# Altium PCB EHR.PcbDoc (part 2 of 4)
Units mm, origin at the board's own origin, x right, y up, seen from the top; angles counter-clockwise.
Board outline 200 x 110 mm, 2 copper layers (Top Layer, Bottom Layer), stack 1.646 mm thick; 17 components, 171 nets, 955 pads, 288 vias.
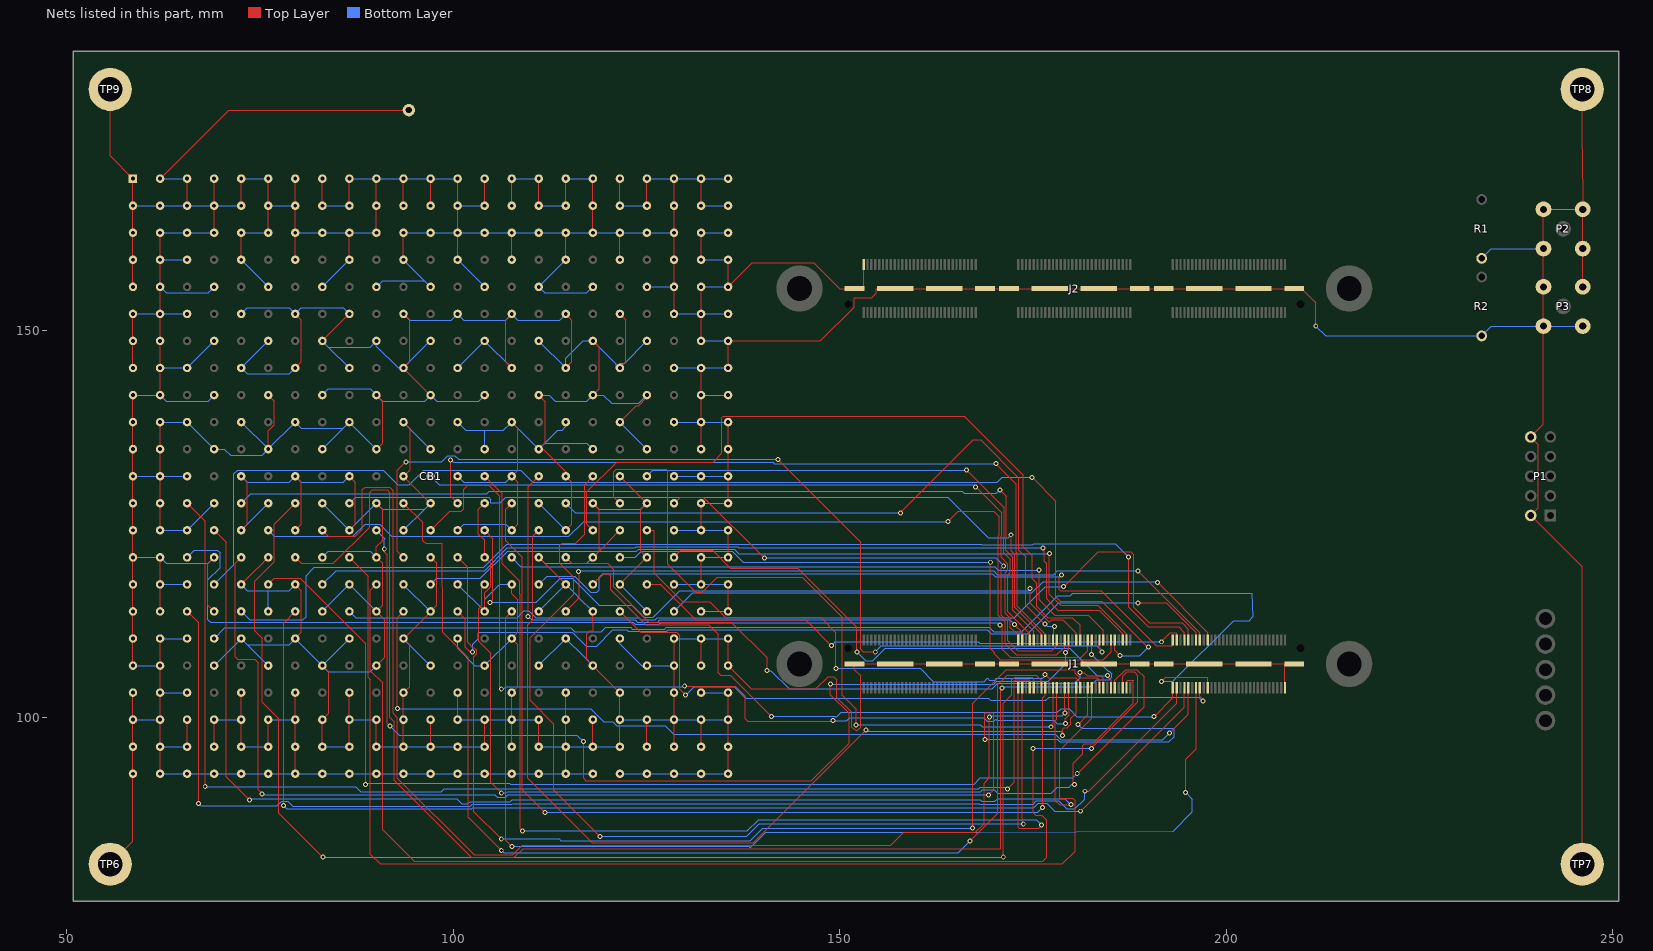
[diagram p2: the nets of this part, all layers, seen from the top]

## Via types
v1: diameter 0.64, hole 0.39, Top Layer to Bottom Layer, 288 vias

## Nets (pads, with @x,y where several pads share a name; then routed paths per layer and width w, separated by ;. In a path a pad name is that pad's centre, name@x,y a point inside that pad or via, vN(x,y) a via of type N, cw(c..) or ccw(c..) an arc to the next point about the centre after c; other vN are vias at no path point) (continued)
DGND: CB1.1 CB1.2 CB1.3 CB1.4 CB1.5 CB1.6 CB1.7 CB1.8 CB1.9 CB1.10 CB1.11 CB1.12 CB1.13 CB1.14 CB1.15 CB1.16 CB1.17 CB1.18 CB1.19 CB1.20 CB1.21 CB1.22 CB1.23 CB1.24 CB1.25 CB1.26 CB1.27 CB1.28 CB1.29 CB1.30 CB1.31 CB1.32 CB1.33 CB1.34 CB1.35 CB1.36 CB1.37 CB1.38 CB1.39 CB1.40 CB1.41 CB1.42 CB1.43 CB1.44 CB1.45 CB1.46 CB1.47 CB1.48 CB1.49 CB1.50 CB1.51 CB1.52 CB1.53 CB1.54 CB1.55 CB1.56 CB1.57 CB1.58 CB1.59 CB1.60 CB1.61 CB1.62 CB1.63 CB1.64 CB1.65 CB1.66 CB1.67 CB1.68 CB1.69 CB1.70 CB1.71 CB1.72 CB1.74 CB1.76 CB1.78 CB1.80 CB1.82 CB1.84 CB1.86 CB1.88 CB1.90 CB1.91 CB1.92 CB1.93 CB1.94 CB1.96 CB1.98 CB1.100 CB1.102 CB1.104 CB1.106 CB1.108 CB1.110 CB1.112 CB1.113 CB1.114 CB1.115 CB1.116 CB1.117 CB1.118 CB1.120 CB1.122 CB1.124 CB1.126 CB1.128 CB1.130 CB1.132 CB1.134 CB1.136 CB1.137 CB1.138 CB1.139 CB1.140 CB1.142 CB1.144 CB1.146 CB1.148 CB1.150 CB1.152 CB1.154 CB1.156 CB1.158 CB1.160 CB1.161 CB1.162 CB1.163 CB1.164 CB1.166 CB1.168 CB1.170 CB1.172 CB1.174 CB1.176 CB1.178 CB1.180 CB1.182 CB1.183 CB1.184 CB1.185 CB1.186 CB1.188 CB1.190 CB1.192 CB1.194 CB1.196 CB1.198 CB1.200 CB1.202 CB1.204 CB1.206 CB1.207 CB1.208 CB1.209 CB1.210 CB1.212 CB1.214 CB1.216 CB1.218 CB1.220 CB1.222 CB1.224 CB1.226 CB1.228 CB1.229 CB1.230 CB1.231 CB1.232 CB1.234 CB1.236 CB1.238 CB1.240 CB1.242 CB1.244 CB1.246 CB1.248 CB1.250 CB1.252 CB1.253 CB1.254 CB1.255 CB1.256 CB1.258 CB1.260 CB1.262 CB1.264 CB1.266 CB1.268 CB1.270 CB1.272 CB1.274 CB1.275 CB1.276 CB1.277 CB1.278 CB1.280 CB1.282 CB1.284 CB1.286 CB1.288 CB1.290 CB1.292 CB1.294 CB1.296 CB1.298 CB1.299 CB1.300 CB1.301 CB1.302 CB1.304 CB1.306 CB1.308 CB1.310 CB1.312 CB1.314 CB1.316 CB1.318 CB1.320 CB1.321 CB1.322 CB1.323 CB1.324 CB1.326 CB1.328 CB1.330 CB1.332 CB1.334 CB1.336 CB1.338 CB1.340 CB1.342 CB1.344 CB1.345 CB1.346 CB1.347 CB1.348 CB1.350 CB1.352 CB1.354 CB1.356 CB1.358 CB1.360 CB1.362 CB1.364 CB1.366 CB1.367 CB1.368 CB1.369 CB1.370 CB1.372 CB1.374 CB1.376 CB1.378 CB1.380 CB1.382 CB1.384 CB1.386 CB1.388 CB1.390 CB1.391 CB1.392 CB1.393 CB1.394 CB1.396 CB1.398 CB1.400 CB1.402 CB1.404 CB1.406 CB1.408 CB1.410 CB1.412 CB1.413 CB1.414 CB1.415 CB1.416 CB1.418 CB1.420 CB1.422 CB1.424 CB1.426 CB1.428 CB1.430 CB1.432 CB1.434 CB1.435 CB1.436 CB1.437 CB1.438 CB1.439 CB1.440 CB1.442 CB1.444 CB1.446 CB1.448 CB1.450 CB1.452 CB1.454 CB1.456 CB1.458 CB1.459 CB1.460 CB1.461 CB1.462 CB1.463 CB1.464 CB1.465 CB1.466 CB1.467 CB1.468 CB1.469 CB1.470 CB1.471 CB1.472 CB1.473 CB1.474 CB1.475 CB1.476 CB1.477 CB1.478 CB1.479 CB1.480 CB1.481 CB1.482 CB1.483 CB1.484 CB1.485 CB1.486 CB1.487 CB1.488 CB1.489 CB1.490 CB1.491 CB1.492 CB1.493 CB1.494 CB1.495 CB1.496 CB1.497 CB1.498 CB1.499 CB1.500 CB1.501 CB1.502 CB1.503 CB1.504 CB1.505 CB1.506 CB1.507 CB1.508 CB1.509 CB1.510 CB1.511 CB1.512 CB1.513 CB1.514 CB1.515 CB1.516 CB1.517 CB1.518 CB1.519 CB1.520 CB1.521 CB1.522 CB1.523 CB1.524 CB1.525 CB1.526 CB1.527 CB1.528 CB1.529 J1.180 J1.181 J1.182 J1.183 J1.184 J1.185 J1.186 J1.187 J1.188 J1.189 J1.190 J1.191 J1.192 J2.180 J2.181 J2.182 J2.183 J2.184 J2.185 J2.186 J2.187 J2.188 J2.189 J2.190 J2.191 J2.192 P1.2 P1.10 P2.2 P2.3 P2.4 P2.5 P3.2 P3.3 P3.4 P3.5 pad.0@94.234,178.562 R1.1 R2.1 TP6.0 TP7.0 TP8.0 TP9.0 | length 2063.3
  Top Layer w0.15: TP6.0@55.6,81 58.547,83.947 CB1.507@58.547,92.7 CB1.484@58.547,96.2 CB1.461@58.547,99.7 CB1.438@58.547,103.2 ; TP9.0@55.6,181.25 55.6,172.647 CB1.1@58.547,169.7 CB1.24@58.547,166.2 CB1.47@58.547,162.7 CB1.70@58.547,159.2 CB1.93@58.547,155.7 ; CB1.415@58.547,106.7 CB1.392@58.547,110.2 CB1.369@58.547,113.7 CB1.346@58.547,117.2 CB1.323@58.547,120.7 CB1.300@58.547,124.2 CB1.277@58.547,127.7 CB1.254@58.547,131.2 CB1.231@58.547,134.7 CB1.208@58.547,138.2 CB1.185@58.547,141.7 ; CB1.162@58.547,145.2 CB1.139@58.547,148.7 CB1.116@58.547,152.2 ; CB1.508@62.047,92.7 CB1.485@62.047,96.2 CB1.462@62.047,99.7 CB1.439@62.047,103.2 CB1.416@62.047,106.7 CB1.393@62.047,110.2 ; CB1.370@62.047,113.7 CB1.347@62.047,117.2 CB1.324@62.047,120.7 ; CB1.301@62.047,124.2 CB1.278@62.047,127.7 CB1.255@62.047,131.2 CB1.232@62.047,134.7 CB1.209@62.047,138.2 ; CB1.186@62.047,141.7 CB1.163@62.047,145.2 CB1.140@62.047,148.7 CB1.117@62.047,152.2 CB1.94@62.047,155.7 CB1.71@62.047,159.2 CB1.48@62.047,162.7 ; CB1.2@62.047,169.7 70.909,178.562 pad.0@94.234,178.562 ; CB1.486@65.547,96.2 CB1.463@65.547,99.7 ; CB1.26@65.547,166.2 CB1.3@65.547,169.7 ; CB1.487@69.047,96.2 CB1.464@69.047,99.7 ; CB1.372@69.047,113.7 68.25,114.497 68.25,119.903 CB1.326@69.047,120.7 ; CB1.50@69.047,162.7 CB1.27@69.047,166.2 CB1.4@69.047,169.7 ; CB1.488@72.547,96.2 CB1.465@72.547,99.7 CB1.442@72.547,103.2 ; CB1.350@72.547,117.2 74.719,119.372 74.723,119.372 76.047,120.696 CB1.328@76.047,120.7 ; CB1.304@72.547,124.2 73.33,124.983 73.33,130.417 CB1.258@72.547,131.2 ; CB1.74@72.547,159.2 CB1.51@72.547,162.7 ; CB1.28@72.547,166.2 CB1.5@72.547,169.7 ; CB1.489@76.047,96.2 CB1.466@76.047,99.7 ; CB1.236@76.047,134.7 76.047,137.068 76.835,137.856 76.835,140.912 CB1.190@76.047,141.7 ; CB1.52@76.047,162.7 CB1.29@76.047,166.2 CB1.6@76.047,169.7 ; CB1.513@79.547,92.7 CB1.490@79.547,96.2 CB1.467@79.547,99.7 CB1.444@79.547,103.2 ; CB1.398@79.547,110.2 80.34,110.993 80.34,116.407 CB1.352@79.547,117.2 ; CB1.306@79.547,124.2 80.34,124.993 80.34,130.407 CB1.260@79.547,131.2 ; CB1.168@79.547,145.2 80.34,145.993 80.34,151.407 CB1.122@79.547,152.2 ; CB1.76@79.547,159.2 CB1.53@79.547,162.7 CB1.30@79.547,166.2 CB1.7@79.547,169.7 ; CB1.491@83.047,96.2 CB1.468@83.047,99.7 83.845,100.498 83.845,105.902 CB1.422@83.047,106.7 ; CB1.146@83.047,148.7 85.125,150.778 CB1.124@86.547,152.2 ; CB1.31@83.047,166.2 CB1.8@83.047,169.7 ; CB1.492@86.547,96.2 CB1.469@86.547,99.7 CB1.446@86.547,103.2 ; CB1.308@86.547,124.2 87.325,124.978 87.325,130.422 CB1.262@86.547,131.2 ; CB1.78@86.547,159.2 CB1.55@86.547,162.7 ; CB1.32@86.547,166.2 CB1.9@86.547,169.7 ; CB1.493@90.047,96.2 CB1.470@90.047,99.7 ; CB1.424@90.047,106.7 91.122,107.775 91.122,112.625 CB1.378@90.047,113.7 90.83,114.483 90.83,119.917 CB1.332@90.047,120.7 90.047,122.047 90.83,122.83 90.83,126.917 CB1.286@90.047,127.7 ; CB1.240@90.047,134.7 90.83,135.483 90.83,140.917 CB1.194@90.047,141.7 ; CB1.56@90.047,162.7 CB1.33@90.047,166.2 CB1.10@90.047,169.7 ; CB1.494@93.547,96.2 CB1.471@93.547,99.7 CB1.448@93.547,103.2 94.336,103.989 94.336,109.411 CB1.402@93.554,110.193 ; CB1.402@93.547,110.2 CB1.402@93.554,110.193 ; CB1.218@93.547,138.2 94.411,137.336 94.411,132.064 CB1.264@93.547,131.2 93.547,131.186 97.033,127.7 CB1.288@97.047,127.7 ; CB1.126@93.547,152.2 94.336,151.411 94.336,145.989 CB1.172@93.547,145.2 93.547,145.181 97.028,141.7 CB1.196@97.047,141.7 ; CB1.80@93.547,159.2 CB1.57@93.547,162.7 ; CB1.34@93.547,166.2 CB1.11@93.547,169.7 ; CB1.495@97.047,96.2 CB1.472@97.047,99.7 ; CB1.334@97.047,120.7 97.841,119.906 97.841,114.494 CB1.380@97.047,113.7 97.047,113.685 CB1.402@93.554,110.193 ; CB1.35@97.047,166.2 CB1.12@97.047,169.7 ; CB1.473@100.547,99.7 CB1.450@100.547,103.2 ; CB1.82@100.547,159.2 CB1.59@100.547,162.7 CB1.36@100.547,166.2 CB1.13@100.547,169.7 ; CB1.497@104.047,96.2 CB1.474@104.047,99.7 ; CB1.382@104.047,113.7 104.047,116.104 104.822,116.879 104.822,119.925 CB1.336@104.047,120.7 104.047,122.889 103.251,123.685 103.251,126.904 CB1.290@104.047,127.7 ; CB1.37@104.047,166.2 CB1.14@104.047,169.7 ; CB1.498@107.547,96.2 CB1.475@107.547,99.7 CB1.452@107.547,103.2 108.331,103.984 108.331,109.416 CB1.406@107.547,110.2 108.331,110.984 108.331,115.211 107.547,115.995 CB1.360@107.547,117.2 ; CB1.314@107.547,124.2 108.331,124.984 108.331,130.416 CB1.268@107.547,131.2 108.331,131.984 108.331,137.416 CB1.222@107.547,138.2 ; CB1.176@107.547,145.2 106.756,145.991 106.756,151.409 CB1.130@107.547,152.2 ; CB1.84@107.547,159.2 CB1.61@107.547,162.7 ; CB1.38@107.547,166.2 CB1.15@107.547,169.7 ; CB1.499@111.047,96.2 CB1.476@111.047,99.7 ; CB1.338@111.047,120.7 111.047,120.696 114.543,117.2 CB1.362@114.547,117.2 ; CB1.200@111.047,141.7 111.894,140.853 111.894,135.547 CB1.246@111.047,134.7 111.628,134.7 114.547,131.781 CB1.270@114.547,131.2 115.341,130.406 115.341,124.994 CB1.316@114.547,124.2 ; CB1.39@111.047,166.2 CB1.16@111.047,169.7 ; CB1.523@114.547,92.7 CB1.500@114.547,96.2 CB1.477@114.547,99.7 CB1.454@114.547,103.2 ; CB1.178@114.547,145.2 115.341,145.994 115.341,151.406 CB1.132@114.547,152.2 ; CB1.86@114.547,159.2 CB1.63@114.547,162.7 ; CB1.40@114.547,166.2 CB1.17@114.547,169.7 ; CB1.501@118.047,96.2 CB1.478@118.047,99.7 ; CB1.386@118.047,113.7 118.047,112.268 118.071,112.244 118.071,111.215 118.034,111.178 117.642,111.178 117.272,110.807 117.272,107.475 CB1.432@118.047,106.7 CB1.456@121.547,103.2 CB1.479@121.547,99.7 CB1.502@121.547,96.2 ; CB1.340@118.047,120.7 118.847,121.5 ; CB1.294@118.047,127.7 118.847,126.9 118.847,121.5 ; CB1.202@118.047,141.7 118.847,142.5 118.847,147.9 CB1.156@118.047,148.7 ; CB1.64@118.047,162.7 CB1.41@118.047,166.2 CB1.18@118.047,169.7 ; CB1.364@121.547,117.2 121.551,117.2 125.047,120.696 CB1.342@125.047,120.7 124.257,121.49 124.257,126.91 CB1.296@125.047,127.7 125.033,127.7 121.547,131.186 CB1.272@121.547,131.2 ; CB1.318@121.547,124.2 118.847,121.5 ; CB1.226@121.547,138.2 123.673,140.326 123.989,140.326 125.047,141.383 CB1.204@125.047,141.7 ; CB1.180@121.547,145.2 122.326,145.979 122.326,151.421 CB1.134@121.547,152.2 ; CB1.88@121.547,159.2 CB1.65@121.547,162.7 ; CB1.42@121.547,166.2 CB1.19@121.547,169.7 ; CB1.503@125.047,96.2 CB1.480@125.047,99.7 ; CB1.43@125.047,166.2 CB1.20@125.047,169.7 ; CB1.504@128.547,96.2 CB1.481@128.547,99.7 CB1.458@128.547,103.2 CB1.435@128.547,106.7 CB1.412@128.547,110.2 ; CB1.136@128.547,152.2 CB1.113@128.547,155.7 CB1.90@128.547,159.2 CB1.67@128.547,162.7 CB1.44@128.547,166.2 CB1.21@128.547,169.7 ; CB1.505@132.047,96.2 CB1.482@132.047,99.7 ; CB1.436@132.047,106.7 CB1.413@132.047,110.2 ; CB1.367@132.047,117.2 CB1.344@132.047,120.7 ; CB1.321@132.047,124.2 CB1.298@132.047,127.7 ; CB1.252@132.047,134.7 CB1.229@132.047,138.2 CB1.206@132.047,141.7 CB1.183@132.047,145.2 ; CB1.160@132.047,148.7 CB1.137@132.047,152.2 CB1.114@132.047,155.7 ; CB1.91@132.047,159.2 CB1.68@132.047,162.7 ; CB1.45@132.047,166.2 CB1.22@132.047,169.7 ; CB1.529@135.547,92.7 CB1.506@135.547,96.2 CB1.483@135.547,99.7 CB1.460@135.547,103.2 ; CB1.414@135.547,110.2 CB1.437@135.547,106.7 138.564,103.683 146.914,103.683 148.488,105.258 149.225,105.258 149.631,104.851 149.631,102.558 151.562,100.627 151.562,98.742 152.184,98.247 152.679,98.742 152.679,105.385 151.892,106.172 J1.181@151.892,106.915 J1.182@157.162,106.915 J1.183@163.512,106.915 J1.184@168.783,106.915 J1.185@171.894,106.915 J1.186@177.165,106.915 J1.187@183.515,106.915 J1.188@188.785,106.915 J1.189@191.897,106.915 J1.190@197.167,106.915 J1.191@203.517,106.915 J1.192@207.598,106.915 ; CB1.391@135.547,113.7 CB1.368@135.547,117.2 ; CB1.345@135.547,120.7 CB1.322@135.547,124.2 ; CB1.299@135.547,127.7 CB1.276@135.547,131.2 CB1.253@135.547,134.7 CB1.230@135.547,138.2 ; CB1.184@135.547,145.2 CB1.161@135.547,148.7 147.475,148.7 151.841,153.066 151.841,154.264 151.867,154.289 154.139,154.289 154.732,154.882 154.732,155.455 154.762,155.485 209.753,155.485 211.582,153.656 v1(211.582,150.622) ; CB1.92@135.547,159.2 CB1.115@135.547,155.7 138.673,158.826 146.66,158.826 150.001,155.485 153.082,155.485 J2.180@153.082,158.571 ; J1.180@207.598,103.829 J1.192@207.598,106.915 ; J1.192@208.788,106.915 J1.192@207.598,106.915 ; P2.5@241.046,165.735 P2.2@241.046,160.655 P3.5@241.046,155.702 P3.2@241.046,150.622 241.046,137.931 P1.10@239.395,136.28 240.386,135.289 240.386,127.111 P1.2@239.395,126.12 246.05,119.465 TP7.0@246.05,81 ; TP8.0@246.05,181.25 246.05,173.558 P2.4@246.126,165.735 P2.3@246.126,160.655 P3.4@246.126,155.702
  Bottom Layer w0.15: CB1.461@58.547,99.7 CB1.462@62.047,99.7 ; CB1.415@58.547,106.7 CB1.416@62.047,106.7 ; CB1.323@58.547,120.7 CB1.324@62.047,120.7 62.834,119.913 68.26,119.913 CB1.326@69.047,120.7 ; CB1.254@58.547,131.2 CB1.255@62.047,131.2 CB1.256@65.547,131.2 ; CB1.185@58.547,141.7 CB1.186@62.047,141.7 62.828,140.919 68.266,140.919 CB1.188@69.047,141.7 ; CB1.116@58.547,152.2 CB1.117@62.047,152.2 CB1.118@65.547,152.2 ; CB1.24@58.547,166.2 CB1.25@62.047,166.2 CB1.26@65.547,166.2 CB1.27@69.047,166.2 CB1.28@72.547,166.2 ; CB1.508@62.047,92.7 CB1.509@65.547,92.7 CB1.510@69.047,92.7 CB1.511@72.547,92.7 CB1.512@76.047,92.7 CB1.513@79.547,92.7 CB1.514@83.047,92.7 CB1.515@86.547,92.7 CB1.516@90.047,92.7 CB1.517@93.547,92.7 CB1.518@97.047,92.7 CB1.519@100.547,92.7 CB1.520@104.047,92.7 CB1.521@107.547,92.7 CB1.522@111.047,92.7 CB1.523@114.547,92.7 CB1.524@118.047,92.7 ; CB1.485@62.047,96.2 CB1.486@65.547,96.2 ; CB1.439@62.047,103.2 CB1.440@65.547,103.2 ; CB1.393@62.047,110.2 CB1.394@65.547,110.2 ; CB1.347@62.047,117.2 CB1.348@65.547,117.2 ; CB1.301@62.047,124.2 CB1.302@65.547,124.2 65.547,124.215 69.032,127.7 CB1.280@69.047,127.7 ; CB1.209@62.047,138.2 CB1.210@65.547,138.2 65.547,138.185 69.032,134.7 CB1.234@69.047,134.7 70.383,134.7 71.175,133.909 75.256,133.909 CB1.236@76.047,134.7 CB1.236@76.047,134.725 ; CB1.163@62.047,145.2 CB1.164@65.547,145.2 65.547,145.215 69.032,148.7 CB1.142@69.047,148.7 ; CB1.94@62.047,155.7 62.832,154.915 68.262,154.915 CB1.96@69.047,155.7 ; CB1.71@62.047,159.2 CB1.72@65.547,159.2 ; CB1.48@62.047,162.7 CB1.49@65.547,162.7 CB1.50@69.047,162.7 ; CB1.2@62.047,169.7 CB1.3@65.547,169.7 ; CB1.464@69.047,99.7 CB1.465@72.547,99.7 ; CB1.418@69.047,106.7 CB1.396@72.547,110.195 ; CB1.488@72.547,96.2 CB1.489@76.047,96.2 ; CB1.396@72.547,110.2 CB1.396@72.547,110.195 ; CB1.350@72.547,117.2 73.336,116.406 76.042,116.408 ; CB1.304@72.547,124.2 72.547,124.205 76.042,127.7 CB1.282@76.047,127.7 ; CB1.258@72.547,131.2 73.343,130.404 78.751,130.404 CB1.260@79.547,131.2 80.343,130.404 85.751,130.404 CB1.262@86.547,131.2 ; CB1.212@72.547,138.2 72.547,138.195 CB1.236@76.047,134.725 ; CB1.120@72.547,152.2 73.322,152.975 78.772,152.975 CB1.122@79.547,152.2 80.331,152.984 85.763,152.984 CB1.124@86.547,152.2 ; CB1.74@72.547,159.2 72.547,159.195 76.042,155.7 CB1.98@76.047,155.7 ; CB1.51@72.547,162.7 CB1.52@76.047,162.7 ; CB1.5@72.547,169.7 CB1.6@76.047,169.7 ; CB1.466@76.047,99.7 CB1.467@79.547,99.7 ; CB1.420@76.047,106.7 76.042,106.7 73.321,109.421 ; CB1.374@76.047,113.7 76.042,113.7 76.042,116.408 ; CB1.144@76.047,148.7 76.042,148.7 72.547,145.205 CB1.166@72.547,145.2 73.323,144.424 78.771,144.424 CB1.168@79.547,145.2 ; CB1.29@76.047,166.2 CB1.30@79.547,166.2 ; CB1.352@79.547,117.2 78.755,116.408 76.042,116.408 ; CB1.53@79.547,162.7 CB1.54@83.047,162.7 CB1.55@86.547,162.7 CB1.56@90.047,162.7 ; CB1.491@83.047,96.2 CB1.492@86.547,96.2 ; CB1.376@83.047,113.7 83.047,113.714 CB1.354@86.538,117.2 ; CB1.330@83.047,120.7 83.835,121.488 89.259,121.488 CB1.332@90.047,120.7 ; CB1.284@83.047,127.7 83.047,127.686 CB1.308@86.538,124.2 ; CB1.238@83.047,134.7 83.033,134.7 83.04,134.707 85.761,137.414 ; CB1.192@83.047,141.7 83.841,142.494 89.253,142.494 CB1.194@90.047,141.7 90.828,140.919 96.266,140.919 CB1.196@97.047,141.7 97.828,140.919 103.266,140.919 CB1.198@104.047,141.7 ; CB1.146@83.047,148.7 83.054,148.693 83.836,147.897 ; CB1.100@83.047,155.7 83.047,155.714 86.533,159.2 CB1.78@86.547,159.2 ; CB1.31@83.047,166.2 CB1.32@86.547,166.2 ; CB1.469@86.547,99.7 CB1.470@90.047,99.7 ; CB1.400@86.547,110.2 86.533,110.2 CB1.422@83.033,106.7 ; CB1.354@86.547,117.2 CB1.354@86.538,117.2 ; CB1.308@86.547,124.2 CB1.308@86.538,124.2 ; CB1.216@86.547,138.2 CB1.216@86.542,138.195 ; CB1.170@86.547,145.2 86.533,145.2 83.836,147.897 ; CB1.9@86.547,169.7 CB1.10@90.047,169.7 CB1.11@93.547,169.7 CB1.12@97.047,169.7 CB1.13@100.547,169.7 ; CB1.493@90.047,96.2 CB1.494@93.547,96.2 CB1.495@97.047,96.2 CB1.496@100.547,96.2 CB1.497@104.047,96.2 ; CB1.424@90.047,106.7 89.265,105.918 83.829,105.918 CB1.422@83.047,106.7 CB1.422@83.033,106.7 ; CB1.378@90.047,113.7 90.038,113.7 CB1.354@86.538,117.2 ; CB1.240@90.047,134.7 90.038,134.7 CB1.216@86.542,138.195 ; CB1.102@90.047,155.7 90.836,156.489 96.258,156.489 ; CB1.402@93.547,110.2 93.547,110.176 97.023,106.7 CB1.426@97.047,106.7 ; CB1.356@93.547,117.2 93.547,117.176 97.023,113.7 CB1.380@97.047,113.7 ; CB1.310@93.547,124.2 93.523,124.2 93.535,124.212 96.271,126.924 ; CB1.218@93.547,138.2 93.547,138.176 97.023,134.7 CB1.242@97.047,134.7 ; CB1.126@93.547,152.2 94.338,151.409 99.756,151.409 CB1.128@100.547,152.2 101.338,151.409 106.756,151.409 CB1.130@107.547,152.2 108.338,151.409 113.756,151.409 CB1.132@114.547,152.2 ; CB1.80@93.547,159.2 93.547,159.176 96.258,156.489 ; CB1.57@93.547,162.7 CB1.58@97.047,162.7 CB1.59@100.547,162.7 CB1.60@104.047,162.7 CB1.61@107.547,162.7 CB1.62@111.047,162.7 CB1.63@114.547,162.7 CB1.64@118.047,162.7 CB1.65@121.547,162.7 CB1.66@125.047,162.7 CB1.67@128.547,162.7 ; CB1.288@97.047,127.7 96.271,126.924 ; CB1.150@97.047,148.7 97.023,148.7 93.547,145.224 CB1.172@93.547,145.2 92.845,145.2 90.047,147.998 CB1.148@90.047,148.7 89.251,147.904 83.836,147.897 ; CB1.104@97.047,155.7 96.258,156.489 ; CB1.473@100.547,99.7 CB1.474@104.047,99.7 CB1.475@107.547,99.7 CB1.476@111.047,99.7 ; CB1.404@100.547,110.2 100.547,108.942 102.789,106.7 CB1.428@104.047,106.7 104.047,106.709 107.538,110.2 CB1.406@107.547,110.2 ; CB1.358@100.547,117.2 100.547,117.186 104.033,113.7 CB1.382@104.047,113.7 104.047,115.26 105.987,117.2 CB1.360@107.547,117.2 ; CB1.312@100.547,124.2 101.322,124.975 106.772,124.975 CB1.314@107.547,124.2 ; CB1.266@100.547,131.2 101.343,130.404 106.751,130.404 CB1.268@107.547,131.2 ; CB1.220@100.547,138.2 101.622,137.125 104.033,137.125 ; CB1.174@100.547,145.2 100.547,145.214 104.033,148.7 CB1.152@104.047,148.7 104.047,148.691 107.538,145.2 CB1.176@107.547,145.2 ; CB1.82@100.547,159.2 100.547,159.186 104.033,155.7 CB1.106@104.047,155.7 ; CB1.36@100.547,166.2 CB1.37@104.047,166.2 ; CB1.244@104.047,134.7 104.033,134.7 104.033,137.125 ; CB1.15@107.547,169.7 CB1.16@111.047,169.7 ; CB1.499@111.047,96.2 CB1.500@114.547,96.2 CB1.501@118.047,96.2 CB1.502@121.547,96.2 ; CB1.430@111.047,106.7 111.047,106.724 114.523,110.2 CB1.408@114.547,110.2 116.842,107.905 116.842,107.886 118.029,106.7 CB1.432@118.047,106.7 ; CB1.384@111.047,113.7 111.047,113.724 114.523,117.2 CB1.362@114.547,117.2 116.166,115.581 116.166,115.563 118.029,113.7 CB1.386@118.047,113.7 ; CB1.338@111.047,120.7 111.834,119.913 117.26,119.913 CB1.340@118.047,120.7 ; CB1.292@111.047,127.7 111.047,127.676 114.523,124.2 CB1.316@114.547,124.2 ; CB1.200@111.047,141.7 112.395,141.7 113.176,140.919 117.266,140.919 CB1.202@118.047,141.7 119.397,141.7 120.472,140.625 123.972,140.625 CB1.204@125.047,141.7 ; CB1.154@111.047,148.7 111.047,148.676 114.523,145.2 CB1.178@114.547,145.2 114.547,146.445 116.802,148.7 CB1.156@118.047,148.7 121.072,145.675 121.072,145.2 CB1.180@121.547,145.2 121.547,145.771 121.572,145.796 122.143,145.796 CB1.158@125.047,148.7 ; CB1.39@111.047,166.2 CB1.40@114.547,166.2 ; CB1.224@114.547,138.2 114.547,137.639 114.061,137.153 113.5,137.153 111.822,135.475 ; CB1.86@114.547,159.2 114.523,159.2 111.047,155.724 CB1.108@111.047,155.7 111.832,154.915 117.262,154.915 CB1.110@118.047,155.7 ; CB1.17@114.547,169.7 CB1.18@118.047,169.7 ; CB1.294@118.047,127.7 118.823,126.924 124.271,126.924 CB1.296@125.047,127.7 ; CB1.248@118.047,134.7 117.272,135.475 111.822,135.475 ; CB1.525@121.547,92.7 CB1.526@125.047,92.7 CB1.527@128.547,92.7 CB1.528@132.047,92.7 CB1.529@135.547,92.7 ; CB1.479@121.547,99.7 CB1.480@125.047,99.7 CB1.481@128.547,99.7 CB1.482@132.047,99.7 CB1.483@135.547,99.7 ; CB1.410@121.547,110.2 121.547,109.537 124.384,106.7 CB1.434@125.047,106.7 CB1.435@128.547,106.7 ; CB1.364@121.547,117.2 121.547,117.192 125.039,113.7 CB1.388@125.047,113.7 ; CB1.226@121.547,138.2 121.547,138.192 125.039,134.7 CB1.250@125.047,134.7 ; CB1.42@121.547,166.2 CB1.43@125.047,166.2 ; CB1.112@125.047,155.7 CB1.113@128.547,155.7 ; CB1.20@125.047,169.7 CB1.21@128.547,169.7 CB1.22@132.047,169.7 CB1.23@135.547,169.7 ; CB1.412@128.547,110.2 CB1.413@132.047,110.2 CB1.414@135.547,110.2 ; CB1.366@128.547,117.2 CB1.367@132.047,117.2 CB1.368@135.547,117.2 ; CB1.320@128.547,124.2 CB1.321@132.047,124.2 CB1.322@135.547,124.2 ; CB1.274@128.547,131.2 CB1.275@132.047,131.2 CB1.276@135.547,131.2 ; CB1.228@128.547,138.2 CB1.229@132.047,138.2 CB1.230@135.547,138.2 ; CB1.182@128.547,145.2 CB1.183@132.047,145.2 CB1.184@135.547,145.2 ; CB1.136@128.547,152.2 CB1.137@132.047,152.2 CB1.138@135.547,152.2 ; CB1.459@132.047,103.2 CB1.460@135.547,103.2 ; CB1.390@132.047,113.7 CB1.391@135.547,113.7 ; CB1.344@132.047,120.7 CB1.345@135.547,120.7 ; CB1.298@132.047,127.7 CB1.299@135.547,127.7 ; CB1.206@132.047,141.7 CB1.207@135.547,141.7 ; CB1.160@132.047,148.7 CB1.161@135.547,148.7 ; CB1.114@132.047,155.7 CB1.115@135.547,155.7 ; CB1.91@132.047,159.2 CB1.92@135.547,159.2 ; CB1.68@132.047,162.7 CB1.69@135.547,162.7 ; CB1.45@132.047,166.2 CB1.46@135.547,166.2 ; v1(211.582,150.622) 212.852,149.352 R2.1@233.045,149.352 234.315,150.622 P3.2@241.046,150.622 P3.3@246.126,150.622 ; R1.1@233.045,159.385 234.315,160.655 P2.2@241.046,160.655 ; P2.5@241.046,165.735 P2.4@246.126,165.735 ; CB1.396@72.547,110.195 73.321,109.421 ; 73.321,109.421 78.77,109.423 CB1.398@79.547,110.2 79.547,110.18 CB1.422@83.033,106.7 ; CB1.236@76.047,134.725 79.522,138.2 CB1.214@79.547,138.2 80.333,137.414 85.761,137.414 ; 85.761,137.414 CB1.216@86.542,138.195 ; CB1.308@86.538,124.2 90.038,127.7 CB1.286@90.047,127.7 90.823,126.924 96.271,126.924 ; 104.033,137.125 106.472,137.125 CB1.222@107.547,138.2 110.578,135.169 110.578,135.165 111.044,134.7 CB1.246@111.047,134.7 111.822,135.475
J1_61: CB1.265 J1.61 | length 93.6
  Top Layer w0.15: v1(167.564,129.819) 170.944,126.439 170.944,123.478 170.884,123.418 170.884,120.693 171.754,119.823 171.754,119.051 171.436,118.733 171.436,113.457 172.048,112.845 172.048,111.592 173.084,110.744 J1.61@173.084,110.001
  Bottom Layer w0.15: CB1.265@97.047,131.2 98.174,130.073 167.31,130.073 v1(167.564,129.819)
J1_62: CB1.267 J1.62 | length 137.3
  Top Layer w0.15: CB1.267@104.047,131.2 106.293,128.954 106.293,119.894 108.585,117.602 108.585,115.926 108.636,115.875 108.636,85.598 v1(108.915,85.319) ; J1.62@173.084,103.829 173.084,85.767 173.203,85.649 175.717,85.649 v1(176.124,86.055)
  Bottom Layer w0.15: v1(108.915,85.319) 138.049,85.319 139.496,86.765 175.413,86.765 v1(176.124,86.055)
J1_63: CB1.269 J1.63 | length 84.7
  Top Layer w0.15: v1(109.677,113.03) 109.677,129.83 CB1.269@111.047,131.2 ; v1(172.593,112.005) 173.585,111.014 J1.63@173.585,110.001
  Bottom Layer w0.15: v1(109.677,113.03) 110.109,112.598 123.522,112.598 123.795,112.325 126.422,112.325 126.695,112.598 172,112.598 v1(172.593,112.005)
J1_64: CB1.271 J1.64 | length 129.3
  Top Layer w0.15: CB1.271@118.047,131.2 116.967,130.12 116.967,123.698 115.824,122.555 114.084,122.555 113.767,122.237 113.767,119.913 115.57,118.11 115.57,115.921 109.957,110.307 109.957,102.184 113.005,99.136 113.005,90.551 v1(118.948,84.607) ; J1.64@173.585,103.829 173.585,86.359 v1(173.736,86.208)
  Bottom Layer w0.15: v1(118.948,84.607) 137.947,84.607 139.573,86.233 173.711,86.233 v1(173.736,86.208)
J1_67: CB1.273 J1.67 | length 67.4
  Top Layer w0.15: v1(166.395,131.978) 171.244,127.13 171.244,123.353 171.184,123.293 171.184,121.311 172.054,120.441 172.054,118.751 171.736,118.433 171.736,113.69 174.586,110.84 J1.67@174.586,110.001
  Bottom Layer w0.15: CB1.273@125.047,131.2 125.825,131.978 v1(166.395,131.978)
J1_68: CB1.279 J1.68 | length 159.5
  Top Layer w0.15: CB1.279@65.547,127.7 67.894,125.353 v1(67.894,91.034) ; v1(171.704,90.754) 172.575,91.625 172.575,104.666 172.785,104.877 174.56,104.877 174.586,104.851 J1.68@174.586,103.829
  Bottom Layer w0.15: v1(67.894,91.034) 87.351,91.034 88.034,90.35 98.423,90.35 98.838,90.766 106.745,90.766 106.756,90.754 167.986,90.754 168.163,90.931 171.527,90.931 v1(171.704,90.754)
J1_69: CB1.281 J1.69 | length 120.4
  Top Layer w0.15: v1(170.724,129.438) 171.544,128.618 171.544,123.229 171.484,123.169 171.484,121.611 172.354,120.741 172.354,113.885 175.086,111.152 J1.69@175.086,110.001
  Bottom Layer w0.15: CB1.281@72.547,127.7 73.76,128.913 104.314,128.913 104.626,129.225 165.82,129.225 166.075,128.97 170.256,128.97 v1(170.724,129.438)
J1_70: CB1.283 J1.70 | length 167.2
  Top Layer w0.15: CB1.283@79.547,127.7 76.835,124.988 76.835,120.129 74.295,117.589 74.295,111.201 75.26,110.236 75.26,101.956 77.419,99.797 77.419,87.605 v1(83.109,81.915) ; v1(171.145,81.915) 171.145,101.803 172.275,102.933 172.275,104.838 172.614,105.177 174.879,105.177 175.086,104.97 J1.70@175.086,103.829
  Bottom Layer w0.15: v1(83.109,81.915) v1(171.145,81.915)
J1_73: CB1.285 J1.73 | length 104.4
  Top Layer w0.15: v1(172.149,123.623) 172.149,121.546 172.654,121.041 172.654,114.24 176.087,110.807 J1.73@176.087,110.001
  Bottom Layer w0.15: CB1.285@86.547,127.7 87.346,128.499 104.546,128.499 104.865,128.18 104.865,127.762 106.045,127.762 106.782,128.499 163.959,128.499 169.216,123.242 171.768,123.242 v1(172.149,123.623)
J1_74: CB1.287 J1.74 | length 141.9
  Top Layer w0.15: CB1.287@93.547,127.7 96.037,125.21 96.037,122.872 96.406,122.504 98.527,122.504 98.577,111.049 101.905,107.721 101.905,87.084 v1(106.197,82.791) ; v1(166.853,84.023) 170.409,87.579 170.409,104.191 171.694,105.477 175.385,105.477 176.087,104.775 J1.74@176.087,103.829
  Bottom Layer w0.15: v1(106.197,82.791) 106.515,82.474 165.303,82.474 v1(166.853,84.023)
J1_75: CB1.289 J1.75 | length 102.2
  Top Layer w0.15: v1(99.657,133.312) 99.657,128.59 CB1.289@100.547,127.7 ; v1(170.192,132.83) 172.847,130.175 172.847,121.341 172.954,121.234 172.954,114.381 176.587,110.748 J1.75@176.587,110.001
  Bottom Layer w0.15: v1(99.657,133.312) 99.974,132.994 141.376,132.994 141.54,132.83 v1(170.192,132.83)
J1_76: CB1.291 J1.76 | length 122.7
  Top Layer w0.15: CB1.291@107.547,127.7 106.756,126.909 106.756,122.872 108.936,120.693 108.936,90.607 v1(111.836,87.706) ; v1(176.251,88.341) 176.251,102.533 176.587,102.87 J1.76@176.587,103.829
  Bottom Layer w0.15: v1(111.836,87.706) 175.616,87.706 v1(176.251,88.341)
J1_79: CB1.293 J1.79 | length 88.6
  Top Layer w0.15: v1(157.836,126.467) 167.259,135.89 168.224,135.89 173.177,130.937 173.177,121.641 174.066,120.752 174.066,114.529 v1(176.53,112.065) ; J1.79@177.588,110.001 177.711,110.124 177.711,111.671 v1(177.8,111.76)
  Bottom Layer w0.15: CB1.293@114.547,127.7 115.78,126.467 v1(157.836,126.467) ; v1(176.53,112.065) 176.809,111.785 177.775,111.785 v1(177.8,111.76)
J1_80: CB1.295 J1.80 | length 95.9
  Top Layer w0.15: CB1.295@121.547,127.7 120.752,128.495 120.752,131.762 121.069,132.08 127.559,132.08 127.762,131.877 127.762,119.786 131.343,116.205 132.207,116.205 134.137,118.135 145.136,118.135 150.343,112.928 150.343,102.845 152.121,101.067 v1(152.121,99.009) ; v1(177.343,98.781) 177.588,99.026 J1.80@177.588,103.829
  Bottom Layer w0.15: v1(152.121,99.009) 168.2,99.009 168.428,98.781 v1(177.343,98.781)
J1_81: CB1.297 J1.81 | length 64.8
  Top Layer w0.15: CB1.297@128.547,127.7 129.346,128.499 132.359,128.499 v1(140.233,120.625) ; v1(171.209,119.596) 170.914,119.302 170.914,113.21 171.71,112.415 171.71,109.92 173.037,108.592 177.418,108.592 178.088,109.262 J1.81@178.088,110.001
  Bottom Layer w0.15: v1(140.233,120.625) 170.18,120.625 v1(171.209,119.596)
J1_82: CB1.303 J1.82 | length 161.1
  Top Layer w0.15: CB1.303@69.047,124.2 70.612,122.635 70.612,92.329 v1(73.609,89.332) ; J1.82@178.088,103.829 178.088,99.743 177.895,99.549 177.895,89.235 178.433,88.697 v1(179.908,88.697)
  Bottom Layer w0.15: v1(73.609,89.332) 73.73,89.453 100.423,89.453 101.076,88.799 101.891,88.799 102.166,89.075 107.356,89.075 107.614,89.332 168.16,89.332 168.37,89.122 170.06,89.122 170.424,89.486 179.119,89.486 v1(179.908,88.697)
J1_85: CB1.305 J1.85 | length 124.4
  Top Layer w0.15: v1(163.982,125.324) 165.354,126.695 169.901,126.695 170.644,125.952 170.644,123.602 170.485,123.443 170.485,113.215 171.41,112.291 171.41,109.493 172.83,108.072 178.094,108.072 179.089,109.068 J1.85@179.089,110.001
  Bottom Layer w0.15: CB1.305@76.047,124.2 76.828,123.419 86.995,123.419 88.57,124.993 90.487,124.993 92.056,123.425 114.941,123.425 116.84,125.324 v1(163.982,125.324)
J1_86: CB1.307 J1.86 | length 161.8
  Top Layer w0.15: CB1.307@83.047,124.2 83.822,123.425 87.325,123.425 88.24,124.339 88.24,129.451 88.582,129.794 91.757,129.794 92.202,129.35 92.202,100.508 92.761,99.949 92.761,92.151 102.718,82.194 107.671,82.194 108.915,83.439 156.566,83.439 158.242,85.115 167.513,85.115 168.656,86.258 168.656,91.491 169.342,92.177 v1(169.342,100.025) ; J1.86@179.089,103.829 179.089,100.641 v1(179.146,100.584)
  Bottom Layer w0.15: v1(169.342,100.025) 169.52,100.203 178.765,100.203 v1(179.146,100.584)
J1_87: CB1.309 J1.87 | length 136.7
  Top Layer w0.15: v1(91.059,121.793) 91.059,121.437 91.44,121.056 91.44,99.263 v1(91.796,98.908) ; v1(116.84,96.85) 116.84,92.088 117.157,91.77 146.329,91.77 151.206,96.647 151.206,100.508 148.793,102.921 v1(148.793,104.292) ; v1(179.21,108.407) 179.589,108.787 J1.87@179.589,110.001
  Bottom Layer w0.15: CB1.309@90.047,124.2 91.135,123.112 91.059,123.036 v1(91.059,121.793) ; v1(91.796,98.908) 92.989,97.714 115.976,97.714 v1(116.84,96.85) ; v1(148.793,104.292) 169.92,104.292 170.314,104.687 176.987,104.687 179.21,106.91 v1(179.21,108.407)
J1_88: CB1.311 J1.88 | length 120.8
  Top Layer w0.15: CB1.311@97.047,124.2 99.529,126.682 101.028,126.682 101.346,127 101.346,129.54 101.829,130.023 104.555,130.023 105.993,128.585 105.993,103.862 v1(106.197,103.657) ; v1(129.934,104.038) 136.474,104.038 137.795,102.718 137.795,99.809 138.112,99.492 149.022,99.492 v1(149.098,99.568) ; v1(179.197,99.187) 179.197,99.822 179.691,100.316 179.691,101.106 179.589,101.208 J1.88@179.589,103.829
  Bottom Layer w0.15: v1(106.197,103.657) 106.464,103.657 106.782,103.975 129.87,103.975 v1(129.934,104.038) ; v1(149.098,99.568) 150.9,99.568 151.276,99.943 168.628,99.943 169.096,99.475 169.89,99.475 170.186,99.771 170.331,99.626 177.693,99.626 178.131,99.187 v1(179.197,99.187)
J1_91: CB1.313 J1.91 | length 95.3
  Top Layer w0.15: CB1.313@104.047,124.2 105.122,123.125 105.122,115.231 v1(104.75,114.859) ; v1(174.625,116.662) 174.625,114.768 177.054,112.338 177.183,112.338 177.45,112.605 178.847,112.605 180.59,110.862 J1.91@180.59,110.001
  Bottom Layer w0.15: v1(104.75,114.859) 110.693,114.859 113.809,117.975 115.392,117.975 118.889,114.478 123.142,114.478 124.694,112.925 125.832,112.925 129.315,116.408 174.371,116.408 v1(174.625,116.662)
J1_92: CB1.315 J1.92 | length 119
  Top Layer w0.15: CB1.315@111.047,124.2 110.261,123.414 110.261,112.579 109.652,111.969 109.652,92.1 117.983,83.769 138.773,83.769 v1(153.391,98.387) ; v1(178.816,97.663) 178.816,98.463 178.995,98.642 179.423,98.642 179.886,99.105 179.886,99.851 180.59,100.555 J1.92@180.59,103.829
  Bottom Layer w0.15: v1(153.391,98.387) 153.554,98.224 178.577,98.224 178.816,97.985 v1(178.816,97.663)
J1_93: CB1.317 J1.93 | length 98
  Top Layer w0.15: CB1.317@118.047,124.2 117.272,124.975 117.272,129.159 121.133,133.02 133.629,133.02 134.747,134.137 134.747,138.811 134.925,138.989 166.091,138.989 173.761,131.318 173.761,122.047 174.904,120.904 174.904,117.942 175.48,117.366 175.48,114.353 176.928,112.905 180.071,112.905 181.091,111.886 J1.93@181.091,110.001
J1_94: CB1.319 J1.94 | length 71.9
  Top Layer w0.15: CB1.319@125.047,124.2 125.908,124.2 125.933,118.694 129.667,114.96 133.159,114.96 135.194,112.925 147.501,112.925 149.479,110.947 v1(149.479,106.324) ; v1(176.53,105.537) 176.941,105.126 177.165,105.126 180.532,105.105 181.091,104.546 J1.94@181.091,103.829
  Bottom Layer w0.15: v1(149.479,106.324) 160.376,106.324 162.089,104.611 168.658,104.611 169.077,105.03 169.111,105.03 169.322,104.819 170.022,104.819 170.233,105.03 176.252,105.03 176.53,105.308 v1(176.53,105.537)
J1_97: CB1.325 J1.97 | length 133.6
  Top Layer w0.15: v1(170.751,111.95) 171.002,111.7 171.002,108.809 172.04,107.772 181.228,107.772 182.091,108.636 J1.97@182.091,110.001
  Bottom Layer w0.15: CB1.325@65.547,120.7 66.488,121.641 69.469,121.641 69.825,121.285 69.825,119.38 68.25,117.805 68.25,112.624 68.58,112.293 123.254,112.293 123.522,112.025 126.605,112.025 126.848,112.268 170.434,112.268 v1(170.751,111.95)
J1_98: CB1.327 J1.98 | length 187.3
  Top Layer w0.15: CB1.327@72.547,120.7 71.755,119.908 71.755,107.81 72.072,107.493 74.295,107.493 74.752,107.036 74.752,90.602 v1(75.26,90.094) ; v1(168.783,97.142) 168.783,100.559 168.808,100.584 169.875,100.584 169.901,100.559 169.901,90.653 v1(169.215,89.967) ; v1(180.823,99.06) 182.091,100.329 J1.98@182.091,103.829
  Bottom Layer w0.15: v1(75.26,90.094) 75.387,89.967 105.372,89.967 105.664,89.675 106.769,89.675 107.061,89.967 v1(169.215,89.967) ; v1(168.783,97.142) 178.142,97.142 178.466,96.818 192.589,96.818 193.243,97.472 193.243,98.577 193.218,98.603 181.28,98.603 v1(180.823,99.06)
J1_99: CB1.329 J1.99 | length 181.4
  Top Layer w0.15: CB1.329@79.547,120.7 80.334,119.913 84.447,119.913 89.154,124.62 89.154,129.057 89.535,129.438 91.44,129.438 91.796,129.083 91.796,99.998 92.341,99.453 92.341,91.86 102.311,81.89 107.899,81.89 109.017,83.007 170.79,83.007 170.815,83.033 170.815,103.657 v1(170.967,103.81) ; v1(182.592,108.102) J1.99@182.592,110.001
  Bottom Layer w0.15: v1(170.967,103.81) 171.145,103.988 182.347,103.988 183.224,104.865 184.884,104.865 185.203,105.184 185.203,105.636 184.884,105.955 184.739,105.955 v1(182.592,108.102)
J1_100: CB1.331 J1.100 | length 156.6
  Top Layer w0.15: CB1.331@86.547,120.7 88.972,118.275 88.972,105.156 89.272,104.856 89.272,82.28 90.526,81.026 178.791,81.026 180.467,82.702 180.467,89.218 180.149,89.535 178.454,89.535 178.428,89.56 178.428,95.735 182.592,99.899 J1.100@182.592,103.829
J1_103: CB1.333 J1.103 | length 124.6
  Top Layer w0.15: CB1.333@93.547,120.7 92.761,121.486 92.761,131.953 v1(93.866,133.058) ; v1(141.986,133.375) 152.679,122.682 152.679,108.814 153.035,108.458 v1(154.584,108.458) ; J1.103@183.592,110.001 183.592,108.914 183.896,108.61 v1(183.896,108.458)
  Bottom Layer w0.15: v1(93.866,133.058) 98.477,133.058 99.276,133.857 100.202,133.857 100.683,133.375 v1(141.986,133.375) ; v1(154.584,108.458) 155.391,109.265 183.241,109.265 183.896,108.61 v1(183.896,108.458)
J1_104: CB1.335 J1.104 | length 137.1
  Top Layer w0.15: CB1.335@100.547,120.7 101.83,119.417 101.83,109.703 102.529,109.003 102.715,109.003 103.034,108.684 103.034,108.232 102.667,107.865 102.667,87.808 v1(106.197,84.277) ; v1(167.195,85.674) 167.195,101.816 171.541,106.161 180.424,106.161 180.43,106.155 180.43,105.692 181.021,105.101 183.326,105.101 183.592,104.834 J1.104@183.592,103.829
  Bottom Layer w0.15: v1(106.197,84.277) 113.69,84.277 113.905,84.062 138.393,84.062 140.005,85.674 v1(167.195,85.674)
J1_105: CB1.337 J1.105 | length 83.9
  Top Layer w0.15: v1(175.78,119.05) 175.78,115.23 177.805,113.205 182.14,113.205 184.093,111.252 J1.105@184.093,110.001
  Bottom Layer w0.15: CB1.337@107.547,120.7 108.74,119.507 170.069,119.507 170.526,119.05 v1(175.78,119.05)
J1_106: CB1.339 J1.106 | length 81.7
  Top Layer w0.15: CB1.339@114.547,120.7 115.338,119.909 119.969,119.909 120.752,119.126 120.752,116.865 125.292,112.325 135.96,112.325 140.589,107.696 v1(140.589,106.045) ; v1(181.102,105.791) 181.6,105.791 181.99,105.401 183.732,105.401 184.093,105.04 J1.106@184.093,103.829
  Bottom Layer w0.15: v1(140.589,106.045) 141.089,106.045 143.444,103.69 169.741,103.69 170.439,104.387 180.341,104.387 181.102,105.148 v1(181.102,105.791)
J1_109: CB1.341 J1.109 | length 78.3
  Top Layer w0.15: v1(169.469,120.066) 169.469,108.924 169.963,108.43 169.963,108.243 170.739,107.467 184.1,107.467 185.094,108.461 J1.109@185.094,110.001
  Bottom Layer w0.15: CB1.341@121.547,120.7 123.507,120.7 124.282,121.475 136.106,121.475 137.516,120.066 v1(169.469,120.066)
J1_110: CB1.343 J1.110 | length 68.2
  Top Layer w0.15: CB1.343@128.547,120.7 129.437,121.59 133.528,121.59 135.839,119.278 144.577,119.278 152.197,111.658 v1(152.197,108.458) ; v1(184.658,105.41) 184.658,105.211 185.094,104.775 J1.110@185.094,103.829
  Bottom Layer w0.15: v1(152.197,108.458) 153.34,107.315 154.254,107.315 155.891,108.952 179.781,108.952 183.323,105.41 v1(184.658,105.41)
J1_111: CB1.349 J1.111 | length 159.2
  Top Layer w0.15: v1(174.879,131.039) 177.927,127.991 177.927,115.621 178.511,115.037 183.858,115.037 189.776,109.118 v1(189.967,109.118) ; J1.111@185.594,110.001 185.594,108.661 v1(186.28,107.975)
  Bottom Layer w0.15: CB1.349@69.047,117.2 71.603,119.756 71.603,131.508 72.072,131.978 90.919,131.978 92.772,130.125 94.322,130.125 96.175,131.978 108.687,131.978 110.261,130.404 170.358,130.404 170.993,131.039 v1(174.879,131.039) ; v1(186.28,107.975) 188.824,107.975 v1(189.967,109.118)
J1_112: CB1.351 J1.112 | length 149.2
  Top Layer w0.15: CB1.351@76.047,117.2 76.83,117.983 80.213,117.983 88.654,109.542 v1(88.654,91.313) ; v1(180.721,92.71) 180.721,92.723 189.364,101.366 189.364,105.257 188.442,106.179 186.998,106.179 185.594,104.775 J1.112@185.594,103.829
  Bottom Layer w0.15: v1(88.654,91.313) 88.793,91.452 107.268,91.452 107.356,91.364 167.404,91.364 168.198,92.158 180.156,92.158 180.708,92.71 v1(180.721,92.71)
J1_115: CB1.353 J1.115 | length 114.6
  Top Layer w0.15: v1(176.276,121.92) 176.435,121.761 176.435,120.212 176.753,119.895 176.753,115.327 178.212,113.868 183.566,113.868 186.595,110.839 J1.115@186.595,110.001
  Bottom Layer w0.15: CB1.353@83.047,117.2 84.846,118.999 104.038,118.999 106.959,121.92 123.517,121.92 123.672,122.075 136.767,122.075 136.922,121.92 v1(176.276,121.92)
J1_116: CB1.355 J1.116 | length 159.2
  Top Layer w0.15: CB1.355@90.047,117.2 89.272,116.425 89.272,106.016 90.83,104.457 90.83,85.471 94.945,81.356 176.23,81.356 176.789,81.915 176.789,86.66 176.136,87.312 175.336,87.312 175.019,87.63 v1(175.019,95.987) ; v1(182.562,95.987) 188.573,101.997 188.573,105.378 188.072,105.879 187.183,105.879 186.595,105.291 J1.116@186.595,103.829
  Bottom Layer w0.15: v1(175.019,95.987) v1(182.562,95.987)
J1_117: CB1.357 J1.117 | length 100.3
  Top Layer w0.15: v1(177.114,121.183) 177.114,115.922 178.558,114.478 183.38,114.478 187.095,110.763 J1.117@187.095,110.001
  Bottom Layer w0.15: CB1.357@97.047,117.2 97.83,117.983 103.505,117.983 107.01,121.488 123.685,121.488 123.972,121.775 136.335,121.775 136.927,121.183 v1(177.114,121.183)
J1_118: CB1.359 J1.118 | length 122.8
  Top Layer w0.15: CB1.359@104.047,117.2 104.047,116.789 103.683,116.789 103.683,114.478 103.272,114.067 103.272,109.855 104.826,108.301 104.826,91.592 v1(106.197,90.221) ; v1(180.34,91.313) 180.176,91.477 180.176,94.043 181.401,95.268 181.401,96.339 181.626,96.563 182.697,96.563 187.973,101.84 187.973,104.75 187.945,104.778 187.246,104.778 187.095,104.627 J1.118@187.095,103.829
  Bottom Layer w0.15: v1(106.197,90.221) 106.858,90.221 107.01,90.373 168.224,90.373 168.453,90.602 170.002,90.602 170.409,90.195 177.368,90.195 178.155,90.982 179.666,90.982 179.997,91.313 v1(180.34,91.313)
J1_121: CB1.361 J1.121 | length 91.5
  Top Layer w0.15: v1(178.664,118.415) 178.41,118.161 178.41,116.535 178.587,116.357 183.829,116.357 190.953,109.234 192.999,109.234 193.087,109.322 J1.121@193.087,110.001
  Bottom Layer w0.15: CB1.361@111.047,117.2 112.122,118.275 115.698,118.275 117.768,116.205 118.529,116.205 118.847,116.522 118.847,118.11 119.304,118.567 169.738,118.567 170.125,118.18 178.429,118.18 v1(178.664,118.415)
J1_122: CB1.363 J1.122 | length 90.4
  Top Layer w0.15: CB1.363@118.047,117.2 119.44,118.593 120.015,118.593 120.345,118.262 120.345,116.522 124.904,111.963 133.071,111.963 134.302,110.731 134.302,105.778 134.62,105.461 135.814,105.461 v1(141.173,100.101) ; v1(190.678,100.101) 193.087,102.511 J1.122@193.087,103.829
  Bottom Layer w0.15: v1(141.173,100.101) 141.185,100.113 149.324,100.113 149.335,100.101 149.62,100.101 150.165,100.646 178.143,100.646 178.626,101.129 179.654,101.129 180.682,100.101 v1(190.678,100.101)
J1_123: CB1.365 J1.123 | length 73.6
  Top Layer w0.15: CB1.365@125.047,117.2 126.797,117.2 131.372,112.625 145.566,112.625 v1(148.92,109.271) ; v1(191.592,109.779) 192.763,110.95 193.559,110.95 193.587,110.922 J1.123@193.587,110.001
  Bottom Layer w0.15: v1(148.92,109.271) 149.428,109.779 167.939,109.779 168.13,109.588 178.987,109.588 179.178,109.779 v1(191.592,109.779)
J1_124: CB1.371 J1.124 | length 161.7
  Top Layer w0.15: CB1.371@65.547,113.7 67.031,112.216 v1(67.031,88.849) ; v1(181.711,90.441) 182.186,90.441 193.587,101.842 J1.124@193.587,103.829
  Bottom Layer w0.15: v1(67.031,88.849) 67.342,88.538 77.172,88.538 77.787,89.153 78.574,89.153 79.227,88.499 102.191,88.499 102.466,88.775 107.582,88.775 107.656,88.849 168.042,88.849 168.105,88.787 175.006,88.787 175.406,89.186 178.329,89.186 179.363,88.152 180.428,88.152 181.711,89.434 v1(181.711,90.441)
J1_127: CB1.373 J1.127 | length 139.3
  Top Layer w0.15: v1(187.376,120.726) 187.376,114.213 189.88,111.709 193.852,111.709 194.588,110.973 J1.127@194.588,110.001
  Bottom Layer w0.15: CB1.373@72.547,113.7 73.649,112.598 80.518,112.598 80.95,113.03 80.95,118.339 82.017,119.405 103.924,119.405 106.894,122.375 168.283,122.375 168.333,122.324 174.955,122.324 175.096,122.465 185.637,122.465 v1(187.376,120.726)
J1_128: CB1.375 J1.128 | length 151.3
  Top Layer w0.15: v1(78.029,88.608) 78.029,112.182 CB1.375@79.547,113.7 ; v1(181.157,87.852) 194.588,101.282 J1.128@194.588,103.829
  Bottom Layer w0.15: v1(78.029,88.608) 78.437,88.199 102.4,88.199 102.491,88.29 175.11,88.29 175.706,88.886 176.796,88.886 177.83,87.852 v1(181.157,87.852)
J1_129: CB1.377 J1.129 | length 122.9
  Top Layer w0.15: v1(178.968,116.916) 183.451,121.399 187.642,121.399 188.011,121.031 188.011,114.275 190.068,112.217 194.285,112.217 195.089,111.413 J1.129@195.089,110.001
  Bottom Layer w0.15: CB1.377@86.547,113.7 87.344,112.903 108.243,112.903 109.132,113.793 109.777,113.793 110.667,112.903 123.972,112.903 124.25,112.625 126.122,112.625 126.4,112.903 172.568,112.903 176.581,116.916 v1(178.968,116.916)
J1_130: CB1.379 J1.130 | length 121.7
  Top Layer w0.15: v1(92.761,101.143) 92.761,112.914 CB1.379@93.547,113.7 ; v1(192.684,97.993) 195.089,100.397 J1.130@195.089,103.829
  Bottom Layer w0.15: v1(92.761,101.143) 117.76,101.143 119.487,99.416 120.65,99.416 121.141,98.925 127.406,98.925 128.49,97.842 177.866,97.842 178.59,97.118 191.809,97.118 v1(192.684,97.993)
J1_133: CB1.381 J1.133 | length 108.1
  Top Layer w0.15: CB1.381@100.547,113.7 101.53,112.717 101.53,109.049 102.121,108.458 v1(102.489,108.458) ; v1(188.57,114.808) 192.228,114.808 196.089,110.947 J1.133@196.089,110.001
  Bottom Layer w0.15: v1(102.489,108.458) 102.489,109.436 103.251,110.198 103.251,110.958 103.276,110.983 115.406,110.983 117.169,109.22 118.542,109.22 120.625,111.303 122.444,111.303 122.622,111.125 127.622,111.125 127.8,111.303 169.092,111.303 169.606,110.788 174.292,110.788 178.312,114.808 v1(188.57,114.808)
J1_134: CB1.383 J1.134 | length 138.1
  Top Layer w0.15: CB1.383@107.547,113.7 106.756,112.909 106.756,84.074 107.518,83.312 v1(107.569,83.312) ; v1(194.742,90.297) 194.742,94.59 196.089,95.937 J1.134@196.089,103.829
  Bottom Layer w0.15: v1(107.569,83.312) 138.202,83.312 138.405,83.109 140.418,85.122 168.051,85.122 193.167,85.293 195.631,87.757 195.631,89.408 v1(194.742,90.297)
J1_135: CB1.385 J1.135 | length 91
  Top Layer w0.15: CB1.385@114.547,113.7 116.29,115.443 116.29,118.787 v1(116.205,118.872) ; v1(188.577,118.96) 196.59,110.947 J1.135@196.59,110.001
  Bottom Layer w0.15: v1(116.205,118.872) 116.281,118.948 169.933,118.948 170.401,118.48 177.651,118.48 178.13,118.96 v1(188.577,118.96)
J1_136: CB1.387 J1.136 | length 87.5
  Top Layer w0.15: CB1.387@121.547,113.7 124.249,110.998 128.905,110.998 129.322,110.581 129.322,103.609 v1(130.061,102.87) ; J1.136@196.59,103.829 196.59,102.749 196.977,102.362 v1(196.977,102.108)
  Bottom Layer w0.15: v1(130.061,102.87) 131.166,103.975 136.322,103.975 137.807,102.49 169.232,102.49 169.522,102.2 176.659,102.2 177.089,102.629 196.456,102.629 v1(196.977,102.108)
J1_139: CB1.389 J1.139 | length 74.3
  Top Layer w0.15: v1(191.113,117.45) 197.59,110.973 J1.139@197.59,110.001
  Bottom Layer w0.15: CB1.389@128.547,113.7 130.95,116.103 174.849,116.103 176.311,117.565 190.998,117.565 v1(191.113,117.45)
J1_140: CB1.395 J1.140 | length 163.5
  Top Layer w0.15: v1(191.643,104.648) 192.151,105.156 197.569,105.156 197.59,105.134 J1.140@197.59,103.829
  Bottom Layer w0.15: CB1.395@69.047,110.2 70.448,111.601 115.213,111.601 115.725,111.088 119.141,111.088 119.713,111.66 122.922,111.66 123.157,111.425 127.322,111.425 127.557,111.66 169.364,111.66 169.919,111.105 173.566,111.105 178.218,115.758 179.812,115.758 180.129,116.075 203.266,116.075 203.454,113.03 202.943,112.519 200.937,112.519 193.066,104.648 v1(191.643,104.648)